# Allegro board 20210121.brd
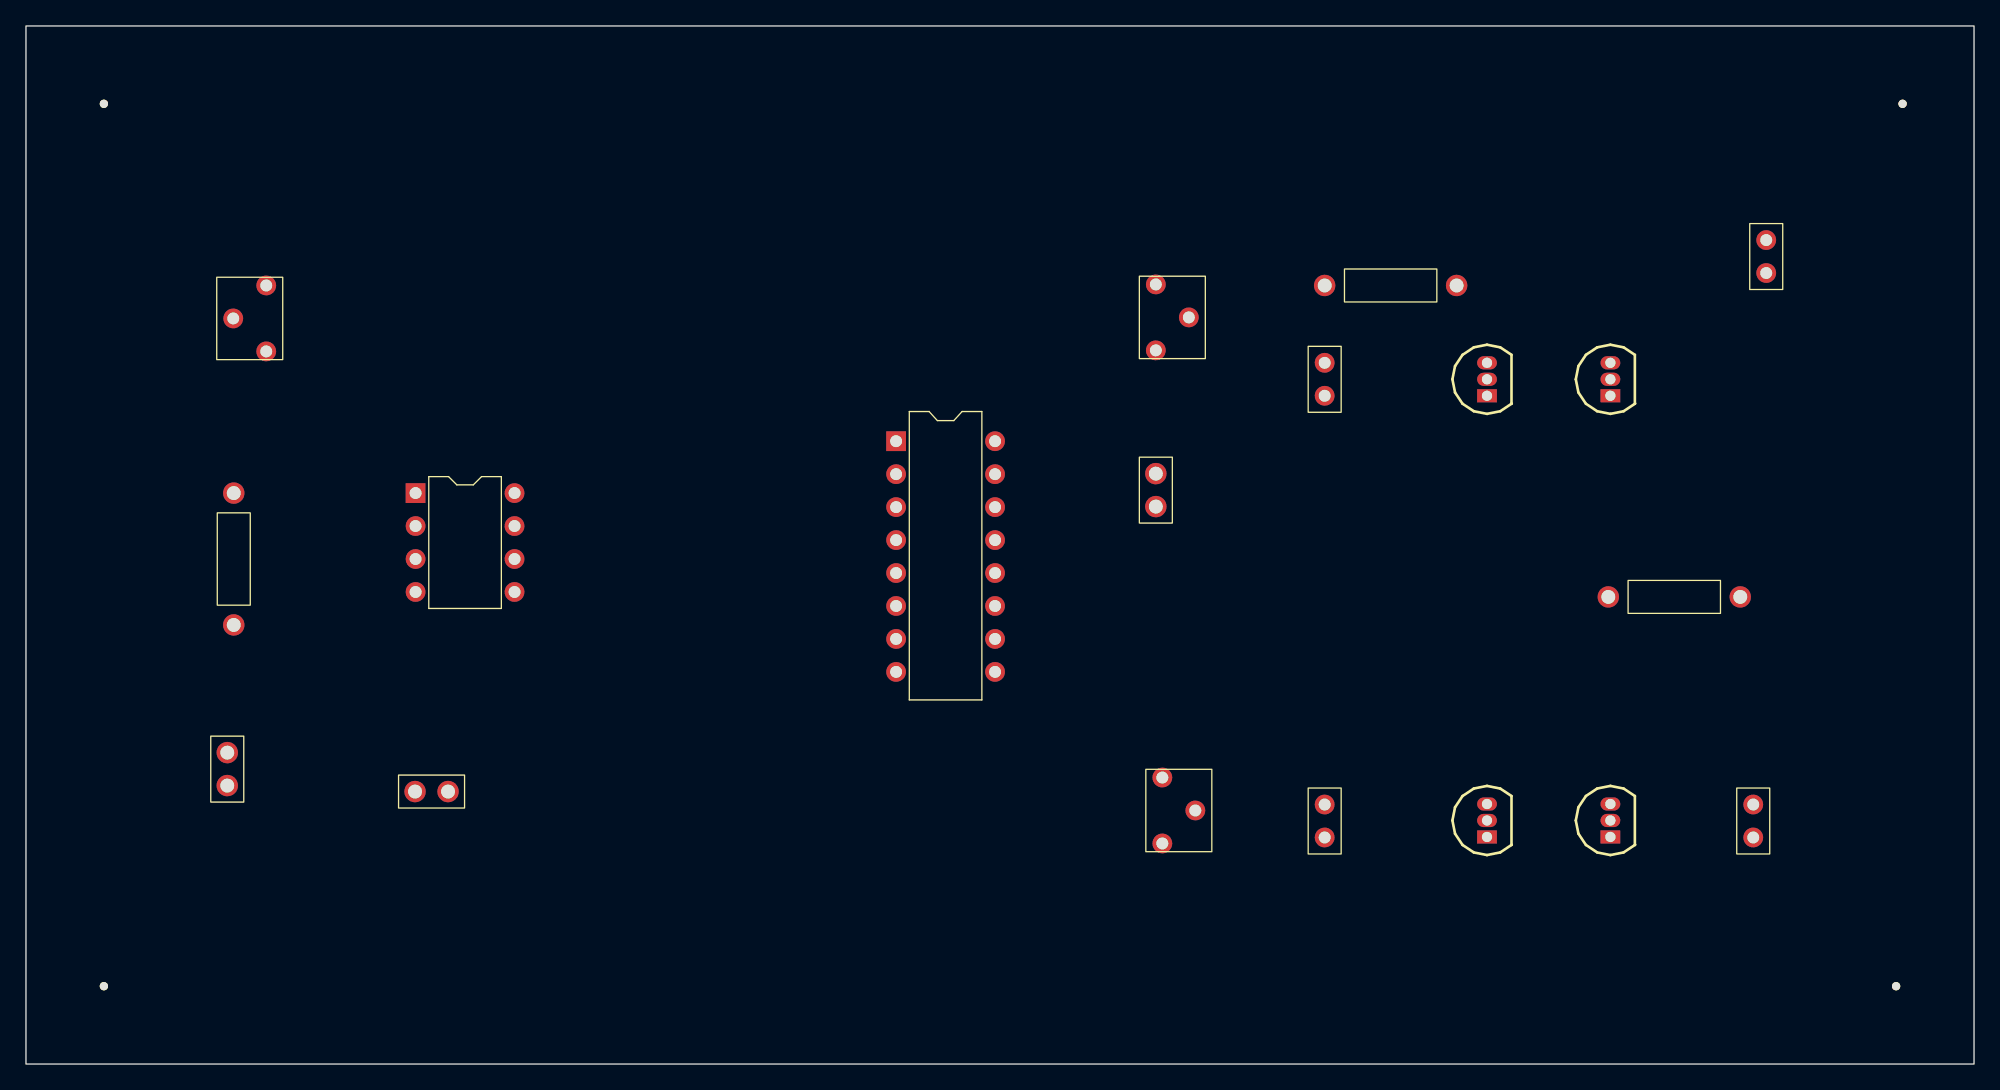
[diagram p0: board, top side]
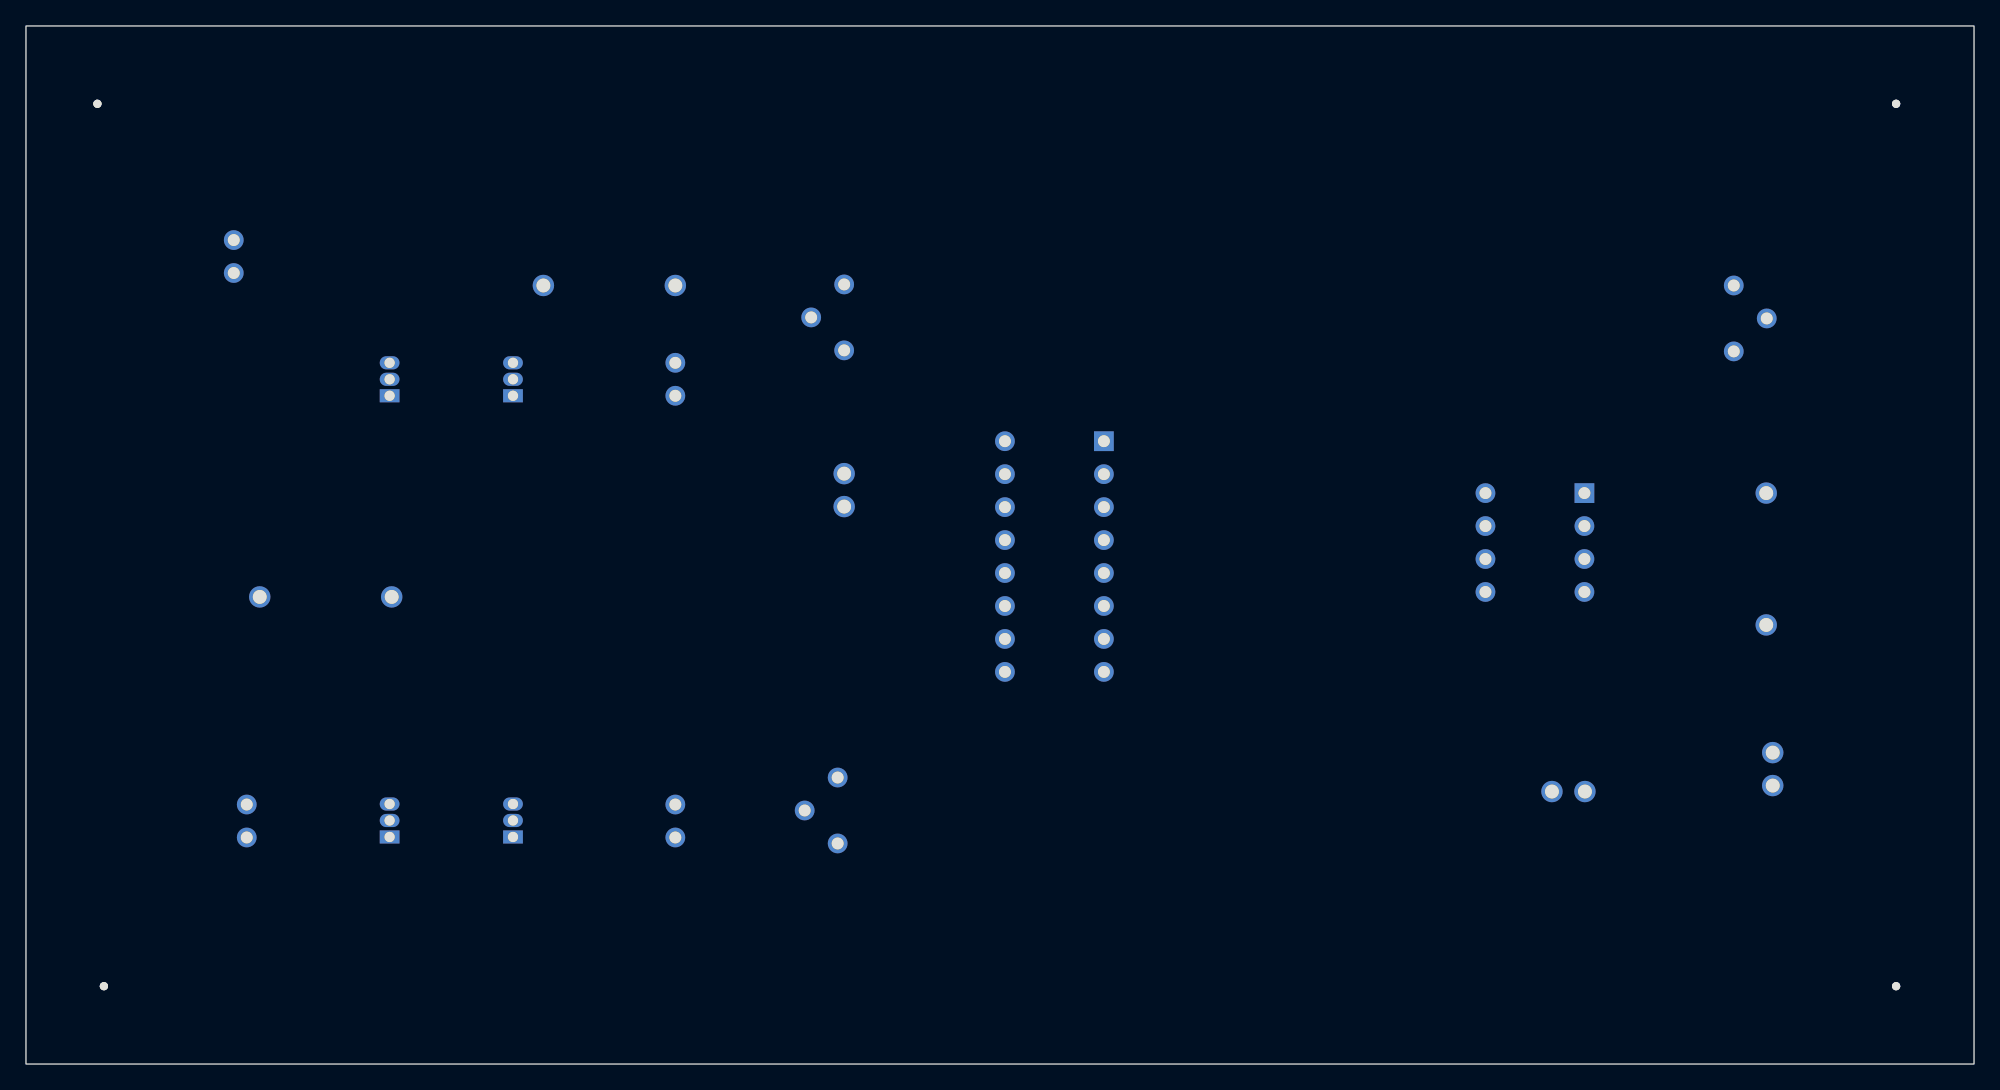
[diagram p1: board, bottom side, seen from below]

Outline 150 x 80 mm; copper layers: TOP, BOTTOM. Coordinates in mm from the lower left corner of the outline.
Outline path: rectangle 0,0 150,80

## Design rules (mm)
constraint set DEFAULT: min track width 0.127

## Placement (name value [footprint] x y rotation side)
C1  0.1uf  [CAPCK05]  87 45.5 180 top
C2  0.1uf  [CAPCK05]  32.5 21 90 top
C3  0.1uf  [CAPCK05]  15.5 24 180 top
LS1  CON2  [JUMPER2]  134 63.5 270 top
LS2  CON2  [JUMPER2]  133 20 270 top
NOREF  -  [unnamed]  144.5 74 0 top
NOREF#2  -  [unnamed]  6 74 0 top
NOREF#3  -  [unnamed]  6 6 0 top
NOREF#4  -  [unnamed]  144 6 0 top
Q1  2SC1815  [TO92]  112.5 51.5 90 top
Q2  2SC1815  [TO92]  122 51.5 90 top
Q3  2SC1815  [TO92]  112.5 17.5 90 top
Q4  2SC1130  [TO92]  122 17.5 90 top
R1  22  [RES400]  100 60 270 top
R2  100k  [RESADJ]  87 55 180 top
R3  100k  [RESADJ]  18.5 60 0 top
R4  1k  [RES400]  16 44 180 top
R5  22  [RES400]  132 36 90 top
R6  1k  [RESADJ]  87.5 17 180 top
SW1  SW1  [JUMPER2]  100 51.5 90 top
SW2  SW2  [JUMPER2]  100 20 270 top
U1  NE555  [DIP8_3]  30 44 0 top
U2  74123  [DIP16_3]  67 48 0 top

## Library data of the parts
C1-C3 = CAP NP: Tolerance: ***; User Part Number: ***
LS1 LS2 = CON2: User Part Number: ***
Q1-Q4 = 2SC1130_0
R1 R4 R5 = R: Tolerance: ***; User Part Number: ***
R2 R3 R6 = RESISTOR VAR: Tolerance: ***; User Part Number: ***
SW1 SW2 = SW PUSHBUTTON: User Part Number: ***
U1 = NE555_4: Tolerance: ***; User Part Number: ***
U2 = 74123_8: Tolerance: ***; User Part Number: ***

## Footprints (pads in the part's own frame, mm; a bottom-side part is the same pattern mirrored in y, then rotated)
CAPCK05
  round 1.651 hole 1.067: 1(0,0) 2(0,2.54)
DIP8_3
  rect 1.524x1.524 hole 0.914: 1(0,0)
  round 1.524 hole 0.914: 2(0,-2.54) 3(0,-5.08) 4(0,-7.62) 5(7.62,-7.62) 6(7.62,-5.08) 7(7.62,-2.54) 8(7.62,0)
DIP16_3
  rect 1.524x1.524 hole 0.914: 1(0,0)
  round 1.524 hole 0.914: 2(0,-2.54) 3(0,-5.08) 4(0,-7.62) 5(0,-10.16) 6(0,-12.7) 7(0,-15.24) 8(0,-17.78) 9(7.62,-17.78) 10(7.62,-15.24) 11(7.62,-12.7) 12(7.62,-10.16) 13(7.62,-7.62) 14(7.62,-5.08) 15(7.62,-2.54) 16(7.62,0)
JUMPER2
  round 1.524 hole 0.914: 1(0,0) 2(2.54,0)
RES400
  round 1.651 hole 1.067: 1(0,0) 2(0,10.16)
RESADJ
  round 1.524 hole 0.914: 1(0,0) 2(-2.54,-2.54) 3(0,-5.08)
TO92
  rect 1.016x1.524 hole 0.787: 1(0,0)
  oval 1.016x1.524 hole 0.787: 2(1.27,0) 3(2.54,0)
unnamed
  round 0.635 hole 3.175 unplated: (0,0)

## Nets
GND: Q2.1(E) Q4.1(E)
VCC: R5.2
N01179: R3.1 R3.2(WIPER) R4.1 U1.7
N01817: R1.1 R2.3 R3.3 U1.4 U1.8(VCC) U2.2 U2.3 U2.16
N02225: C3.1 R4.2 U1.2 U1.6
N02407: C2.2 C3.2 U1.1 U2.8
N02693: U1.3 U2.1
N03329: C1.2 U2.14
N03335: C1.1 R2.1 R2.2(WIPER) U2.15
N03602: R6.3 U2.4
N03939: R6.1 R6.2(WIPER) SW1.1 SW2.2
N05477: LS1.1 R1.2
N05520: Q1.3 SW1.2
N05526: Q1.1(E) Q2.3
N05535: Q3.3 SW2.1
N05541: Q3.1(E) Q4.3
N05545: LS2.2 Q3.2 Q4.2
N05580: LS2.1 R5.1
N06112: LS1.2 Q1.2 Q2.2
N010754: C2.1 U1.5

Pads without a net: U2 5 6 7 9 10 11 12 13
